# EAGLE board Sensor_Node_V2_Dimension (EAGLE 9.6.2)
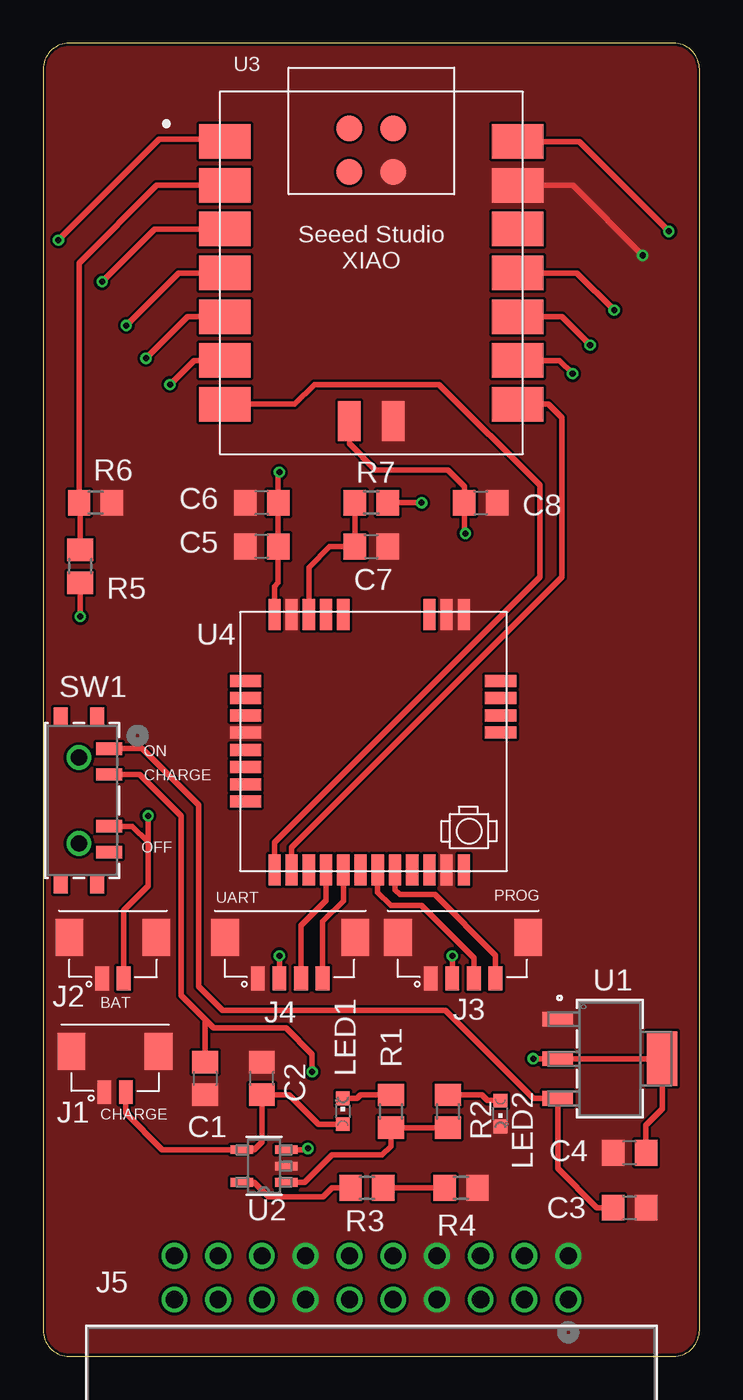
[diagram p0: board, top side]
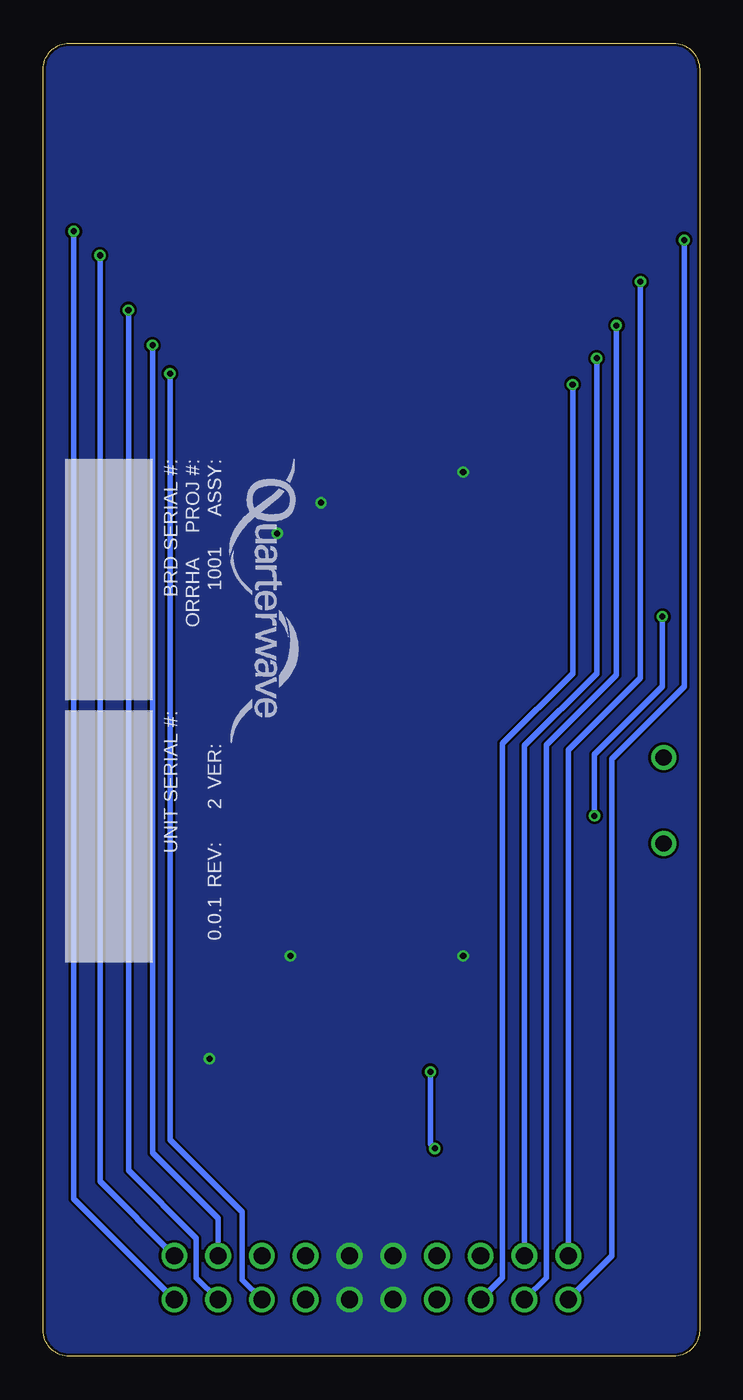
[diagram p1: board, bottom side, seen from below]

Size 38.1 x 76.2 mm. Coordinates in mm from the lower left corner, seen from the top.
Outline: 0,74.68 0,1.52 arc90 1.52,0 36.58,0 arc90 38.1,1.52 38.1,74.68 arc90 36.58,76.2 1.52,76.2 arc90 0,74.68
Copper layers (1*16): Top 0.035mm / dielectric 1.5mm / Bottom 0.035mm
Design rules "SparkFun-2-layer-PCBWay-LIMIT": minimum track width 6mil, minimum drill 0.3mm, track to track 6mil, track to pad 6mil, pad to pad 6mil, via to via 6mil, smd to smd 6mil, copper to edge 6mil, drill to drill 6mil, minimum pad ring 6mil, minimum via ring 6mil, stop-mask expansion 4mil, vias tented up to drill 25mil, thermal gap 10mil

## Footprints (pad centres in the part's own frame; a part is rotated, then mirrored left to right if it is on the bottom)
C0805 = smd 1.3 x 1.5: 1 -0.95,0; 2 0.95,0
5055680271 = smd 0.8 x 1.372: 1 0,-2.576; 2 1.25,-2.576 | smd 1.6 x 2.15: A -1.9,-0.205; B 3.15,-0.205
5055680471 = smd 0.8 x 1.372: 1 -1.25,-2.576; 2 0,-2.576; 3 1.25,-2.576; 4 2.5,-2.576 | smd 1.6 x 2.15: A -3.15,-0.205; B 4.4,-0.205
CONN20_D10-RA-BK_SUL = drill 0.991 pad 1.499: 1 -11.43,-6.35; 2 -11.43,-8.89; 3 -8.89,-6.35; 4 -8.89,-8.89; 5 -6.35,-6.35; 6 -6.35,-8.89; 7 -3.81,-6.35; 8 -3.81,-8.89; 9 -1.27,-6.35; 10 -1.27,-8.89; 11 1.27,-6.35; 12 1.27,-8.89; 13 3.81,-6.35; 14 3.81,-8.89; 15 6.35,-6.35; 16 6.35,-8.89; 17 8.89,-6.35; 18 8.89,-8.89; 19 11.43,-6.35; 20 11.43,-8.89
CHIPLED_0603 = smd 0.8 x 0.8: A 0,-0.75; C 0,0.75
R0805 = smd 1.3 x 1.5: 1 -0.95,0; 2 0.95,0
CUS-13TB_NDC = smd 0.711 x 1.499: 1 -3,2.052; 2 -1.5,2.052; 3 1.5,2.052; 4 3,2.052 | smd 0.991 x 0.813: 5 -4.9,1.352; 6 4.9,1.352; 7 -4.9,-0.748; 8 4.9,-0.748 | drill 0.94 pad 1.448: 9 -2.489,0.305; 10 2.489,0.305
SOT-223_DIO = smd 0.851 x 1.761: 1 -2.3,-3.025; 2 0,-3.025; 3 2.3,-3.025 | smd 3.151 x 1.761: 4 0,3.025
SOT-23-5_MC_MCH = smd 1.321 x 0.508: 1 -1.295,0.95; 2 -1.295,0; 3 -1.295,-0.95; 4 1.295,-0.95; 5 1.295,0.95
XIAO-SAMD21/RP2040-MODULE14P-2.54-21X17.8MM = smd 3 x 2: 1 -8.5,7.62; 2 -8.5,5.08; 3 -8.5,2.54; 4 -8.5,0; 5 -8.5,-2.54; 6 -8.5,-5.08; 7 -8.5,-7.62; 8 8.5,-7.62; 9 8.5,-5.08; 10 8.5,-2.54; 11 8.5,0; 12 8.5,2.54; 13 8.5,5.08; 14 8.5,7.62 | smd 1.5 x 1.5: 15 -1.27,8.39; 16 1.27,8.39; 17 -1.27,5.85; 18 1.27,5.85 | smd 1.3 x 2.3: 19 -1.27,-8.6; 20 1.27,-8.6
RAK3172 = smd 0.7 x 1.8: 1 5.88,6.055; 2 4.88,6.055; 3 3.88,6.055; 4 2.88,6.055; 5 1.88,6.055; 6 0.88,6.055; 7 -0.12,6.055; 8 -1.12,6.055; 9 -2.12,6.055; 10 -3.12,6.055; 11 -4.12,6.055; 12 -5.12,6.055; 17 -5.12,-8.745; 18 -4.12,-8.745; 19 -3.12,-8.745; 20 1.88,-8.745; 21 2.88,-8.745; 22 3.88,-8.745; 23 4.88,-8.745; 24 5.88,-8.745 | smd 1.8 x 0.7: 13 -7.255,-1.9; 14 -7.255,-2.9; 15 -7.255,-3.9; 16 -7.255,-4.9; 25 7.545,-4.9; 26 7.545,-3.9; 27 7.545,-2.9; 28 7.545,-1.9; 29 7.545,-0.9; 30 7.545,0.1; 31 7.545,1.1; 32 7.545,2.1

## Placement (x,y rotation side)
C1  10uF  [C0805]  9.4,16.13 270 top
C2  10uF  [C0805]  12.7,16.13 90 top
C3  10uF  [C0805]  34.04,8.64 0 top
C4  10uF  [C0805]  34.04,11.81 180 top
C5  10uF  [C0805]  12.7,46.99 180 top
C6  100uF  [C0805]  12.7,49.53 180 top
C7  100uF  [C0805]  19.05,46.99 0 top
C8  [C0805]  25.4,49.53 0 top
FRAME1  [STD_INFO_H14_W30]  36.83,52.07 270 bottom
J1  5055680271  [5055680271]  3.56,17.91 0 top
J2  5055680271  [5055680271]  3.43,24.51 0 top
J3  5055680471  [5055680471]  23.75,24.51 0 top
J4  5055680471  [5055680471]  13.72,24.51 0 top
J5  SBH11-PBPC-D10-RA-BK  [CONN20_D10-RA-BK_SUL]  19.05,-3.05 180 top
LED1  [CHIPLED_0603]  17.4,14.22 0 top
LED2  [CHIPLED_0603]  26.54,14.1 180 top
R1  470Ohm  [R0805]  20.19,14.22 90 top
R2  470Ohm  [R0805]  23.5,14.22 270 top
R3  5KOhm  [R0805]  18.8,9.78 180 top
R4  5KOhm  [R0805]  24.26,9.78 180 top
R5  5K  [R0805]  2.16,45.85 270 top
R6  5K  [R0805]  3.05,49.53 180 top
R7  10K  [R0805]  19.05,49.53 0 top
SW1  CUS-13TB  [CUS-13TB_NDC]  1.78,32.26 270 top
U1  NCP1117LPST33T3G  [SOT-223_DIO]  32.89,17.27 270 top
U2  MCP73831T-2DCI/OT  [SOT-23-5_MC_MCH]  12.83,11.05 180 top
U3  XIAO-SAMD21  [XIAO-SAMD21/RP2040-MODULE14P-2.54-21X17.8MM]  19.05,62.87 0 top
U4  RAK3172HF  [RAK3172]  19.3,34.29 180 top

## Library data of the parts
C1-C8 = rcl; SPICEPREFIX: C
FRAME1 = QW Frame; COMPLETE_DATE: 1/28/24; DESIGNER_NAME: DANO LOPEZ; PART_NUMBER: 1001; PROJECT_NAME: ORRHA; R: 0.0.1; V: 2; VERIFIER_NAME: RANIA SABA; VERIFY_DATE: 1/28/24
J1-J4 = Micro-Lock Plus
J5 = SBH11-PBPC-D10-RA-BK; COPYRIGHT: Copyright (C) 2024 Ultra Librarian. All rights reserved.; MANUFACTURER_PART_NUMBER: SBH11-PBPC-D10-RA-BK; MFR_NAME: Sullins
LED1 LED2 = led
R1-R7 = rcl; SPICEPREFIX: R
SW1 = CUS-13TB; COPYRIGHT: Copyright (C) 2021 Ultra Librarian. All rights reserved.; DIGI-KEY_PART_NUMBER_1: 563-1103-2-ND; DIGI-KEY_PART_NUMBER_2: 563-1103-1-ND; DIGI-KEY_PART_NUMBER_3: 563-1103-6-ND; MANUFACTURER_PART_NUMBER: CUS-13TB; MFR_NAME: Nidec Copal Electronics
U1 = NCP1117LPST33T3G
U2 = MCP73831T-2DCI_OT; COPYRIGHT: Copyright (C) 2022 Ultra Librarian. All rights reserved.; DIGI-KEY_PART_NUMBER_1: MCP73831T-2DCI/OTCT-ND; DIGI-KEY_PART_NUMBER_2: MCP73831T-2DCI/OTDKR-ND; DIGI-KEY_PART_NUMBER_3: MCP73831T-2DCI/OTTR-ND; MANUFACTURER_PART_NUMBER: MCP73831T-2DCI/OT; MFR_NAME: Microchip
U3 = Seeed Studio XIAO Series
U4 = RAK3172; AVAILABILITY: Not in stock; CHECK_PRICES: https://www.snapeda.com/parts/RAK3172/Shenzhen+RAKwireless+Technology+Co.%252CLtd./view-part/?ref=eda; DESCRIPTION: RAK3172 is a low-power long-range transceiver module based on the STM32WLE5CC chip. It provides an easy-to-use, small-size, low-power solution for long range wireless data applications; MF: Shenzhen RAKwireless Technology Co.,Ltd.; MP: RAK3172; PACKAGE: Package; PRICE: None; SNAPEDA_LINK: https://www.snapeda.com/parts/RAK3172/Shenzhen+RAKwireless+Technology+Co.%252CLtd./view-part/?ref=snap

## Nets
3.3V: C4.1 C5.1 C6.1 C8.1 J3.2 J4.2 J5.9 J5.10 J5.11 J5.12 R7.2 U1.2 U1.4 U3.19 U4.24
3.3V*: U3.12
5V: J5.1 U3.14
A0: J5.19 U3.1
A2: J5.20 U3.3
A3: J5.17 U3.4
A4: J5.18 U3.5
A5: J5.15 U3.6
A8: J5.5 U3.9
A9: J5.4 U3.10
A10: J5.3 U3.11
GND: C1.2 C2.2 C3.2 C4.2 C5.2 C6.2 C7.2 C8.2 J1.1 J1.A J1.B J2.1 J2.A J2.B J3.1 J3.A J3.B J4.1 J4.A J4.B J5.2 J5.7 J5.8 J5.13 J5.14 LED2.C R4.1 R6.1 U1.1 U2.2 U3.13 U3.18 U3.20 U4.11 U4.17 U4.18 U4.23 U4.28
N$1: LED1.C R1.2
N$2: R1.1 R2.2 U2.1
N$3: R3.2 U2.5
N$4: R3.1 R4.2
N$7: LED2.A R2.1
N$11: C2.1 J1.2 LED1.A U2.4
N$12: J5.6
N$22: J5.16
OFF: SW1.4
RST: C7.1 R7.1 U4.22
SWCLK: J3.4 U4.8
SWDIO: J3.3 U4.7
UART1_RX: J4.4 U4.5
UART1_TX: J4.3 U4.4
UART2_RX: U3.7 U4.1
UART2_TX: U3.8 U4.2
V_BAT: J2.2 R5.2 SW1.3
V_CHARGE: C1.1 SW1.2 U2.3
V_READ: R5.1 R6.2 U3.2
V_REG: C3.1 SW1.1 U1.3

## Tracks (layer width: path | path; a pad name or v marks a point on that pad's centre or on a via)
3.3V  (via drill 0.35)
  Top 0.305: C4.1 34.99,13.4 35.94,14.35 35.94,17.25 U1.4 U1.2 v28.45,17.27 | U4.24 13.42,44.67 13.65,44.89 C5.1 C6.1 13.65,51.24 v13.72,51.31 | U3.19 17.78,52.96 19.3,51.44 23.5,51.44 24.45,50.48 C8.1 24.45,47.81 v24.51,47.75 | R7.2 v21.97,49.53 | J4.2 v13.72,23.24 | J3.2 v23.75,23.24
  pour Bottom (no thermals): 0,74.68 0,1.52 arc90 1.52,0 36.58,0 arc90 38.1,1.52 38.1,74.68 arc90 36.58,76.2 1.52,76.2 arc90
5V  (via drill 0.35)
  Top 0.305: U3.14 31.11,70.48 v36.32,65.28
  Bottom 0.305: v36.32,65.28 36.32,9.14 J5.1
A0  (via drill 0.35)
  Top 0.305: U3.1 10.42,70.61 6.73,70.61 v0.89,64.77
  Bottom 0.305: v0.89,64.77 0.89,38.86 5.08,34.67 5.08,5.84 J5.19
A2  (via drill 0.35)
  Top 0.305: U3.3 6.48,65.41 v3.43,62.36
  Bottom 0.305: v3.43,62.36 3.43,39.37 7.62,35.18 J5.20
A3  (via drill 0.35)
  Top 0.305: U3.4 7.87,62.87 v4.83,59.82
  Bottom 0.305: v4.83,59.82 4.83,39.53 8.89,35.46 8.89,4.57 J5.17
A4  (via drill 0.35)
  Top 0.305: U3.5 8.38,60.33 v5.97,57.91
  Bottom 0.305: v5.97,57.91 5.97,39.62 10.16,35.43 J5.18
A5  (via drill 0.35)
  Top 0.305: U3.6 8.76,57.78 v7.37,56.39
  Bottom 0.305: v7.37,56.39 7.37,39.62 11.43,35.56 11.43,4.57 J5.15
A8  (via drill 0.35)
  Top 0.305: U3.9 29.97,57.78 v30.73,57.02
  Bottom 0.305: v30.73,57.02 30.73,12.57 26.54,8.38 26.54,4.45 J5.5
A9  (via drill 0.35)
  Top 0.305: U3.10 30.1,60.33 v31.75,58.67
  Bottom 0.305: v31.75,58.67 31.75,11.81 27.94,8 J5.4
A10  (via drill 0.35)
  Top 0.305: U3.11 30.99,62.87 v33.15,60.71
  Bottom 0.305: v33.15,60.71 33.15,10.79 29.21,6.86 29.21,4.57 J5.3
GND  (via drill 0.35)
  Top 0.305: U3.13 30.73,67.94 v34.8,63.88
  Bottom 0.305: v34.8,63.88 34.8,10.16 J5.2
  pour Top (no thermals): 0,74.68 0,1.52 arc90 1.52,0 36.58,0 arc90 38.1,1.52 38.1,74.68 arc90 36.58,76.2 1.52,76.2 arc90
N$1
  Top 0.305: LED1.C 18.21,14.97 18.41,15.17 R1.2
N$2
  Top 0.305: R2.2 R1.1 20.19,12.19 19.68,11.68 16.76,11.68 15.18,10.1 U2.1
N$3
  Top 0.305: R3.2 16.76,9.78 16.26,9.27 13.08,9.27 12.25,10.1 U2.5
N$4
  Top 0.305: R3.1 R4.2
N$7
  Top 0.305: LED2.A 25.79,14.85 25.47,15.17 R2.1
N$11
  Top 0.305: J1.2 4.81,14.12 6.92,12 U2.4 12.25,12 12.7,12.45 C2.1 14.29,15.18 15.99,13.47 LED1.A
RST
  Top 0.305: R7.1 C7.1 16.64,46.99 15.42,45.78 U4.22
SWCLK
  Top 0.305: U4.8 20.42,27.07 20.7,26.8 22.73,26.8 26.25,23.28 J3.4
SWDIO
  Top 0.305: U4.7 19.42,26.93 20.19,26.16 21.97,26.16 25,23.13 J3.3
UART1_RX
  Top 0.305: J4.4 16.22,25.23 17.42,26.44 U4.5
UART1_TX
  Top 0.305: J4.3 14.97,25 16.42,26.46 U4.4
UART2_RX
  Top 0.305: U3.7 14.61,55.24 15.75,56.39 22.99,56.39 28.83,50.55 28.83,45.21 13.42,29.81 U4.1
UART2_TX
  Top 0.305: U3.8 29.34,55.24 30.1,54.48 30.1,45.21 14.42,29.54 U4.2
V_BAT  (via drill 0.35)
  Top 0.305: J2.2 4.68,25.89 6.1,27.3 6.1,29.84 | 6.1,29.84 5.18,30.76 SW1.3 | 6.1,29.84 v6.1,31.37 | v2.16,42.93 R5.2
  Bottom 0.305: v6.1,31.37 6.1,34.92 2.16,38.86 v2.16,42.93
V_CHARGE  (via drill 0.35)
  Top 0.305: SW1.2 5.61,33.76 8,31.37 8,20.95 9.4,19.56 | 9.4,19.56 C1.1 | 9.4,19.56 9.91,19.05 14.1,19.05 15.62,17.53 v15.62,16.51 | v15.37,12.06 15.3,12 U2.3
  Bottom 0.305: v15.62,16.51 15.62,12.32 v15.37,12.06
V_READ
  Top 0.305: U3.2 6.6,67.94 2.1,63.44 R6.2 2.16,49.47 R5.1
V_REG
  Top 0.305: SW1.1 5.76,35.26 9.02,32 9.02,21.46 10.41,20.07 23.37,20.07 28.46,14.97 U1.3 29.87,10.9 32.13,8.64 C3.1

## Text on the board
tPlace: ON | CHARGE | OFF | UART | PROG | BAT | CHARGE